# Altium PCB 网关.PcbDoc
Units mm, origin at the board's own origin, x right, y up, seen from the top; angles counter-clockwise.
Board outline 85.2 x 60.2 mm, 2 copper layers (Top Layer, Bottom Layer); 23 components, 24 nets, 150 pads, 101 vias.
Unrouted connection lines stored in the file: 2.
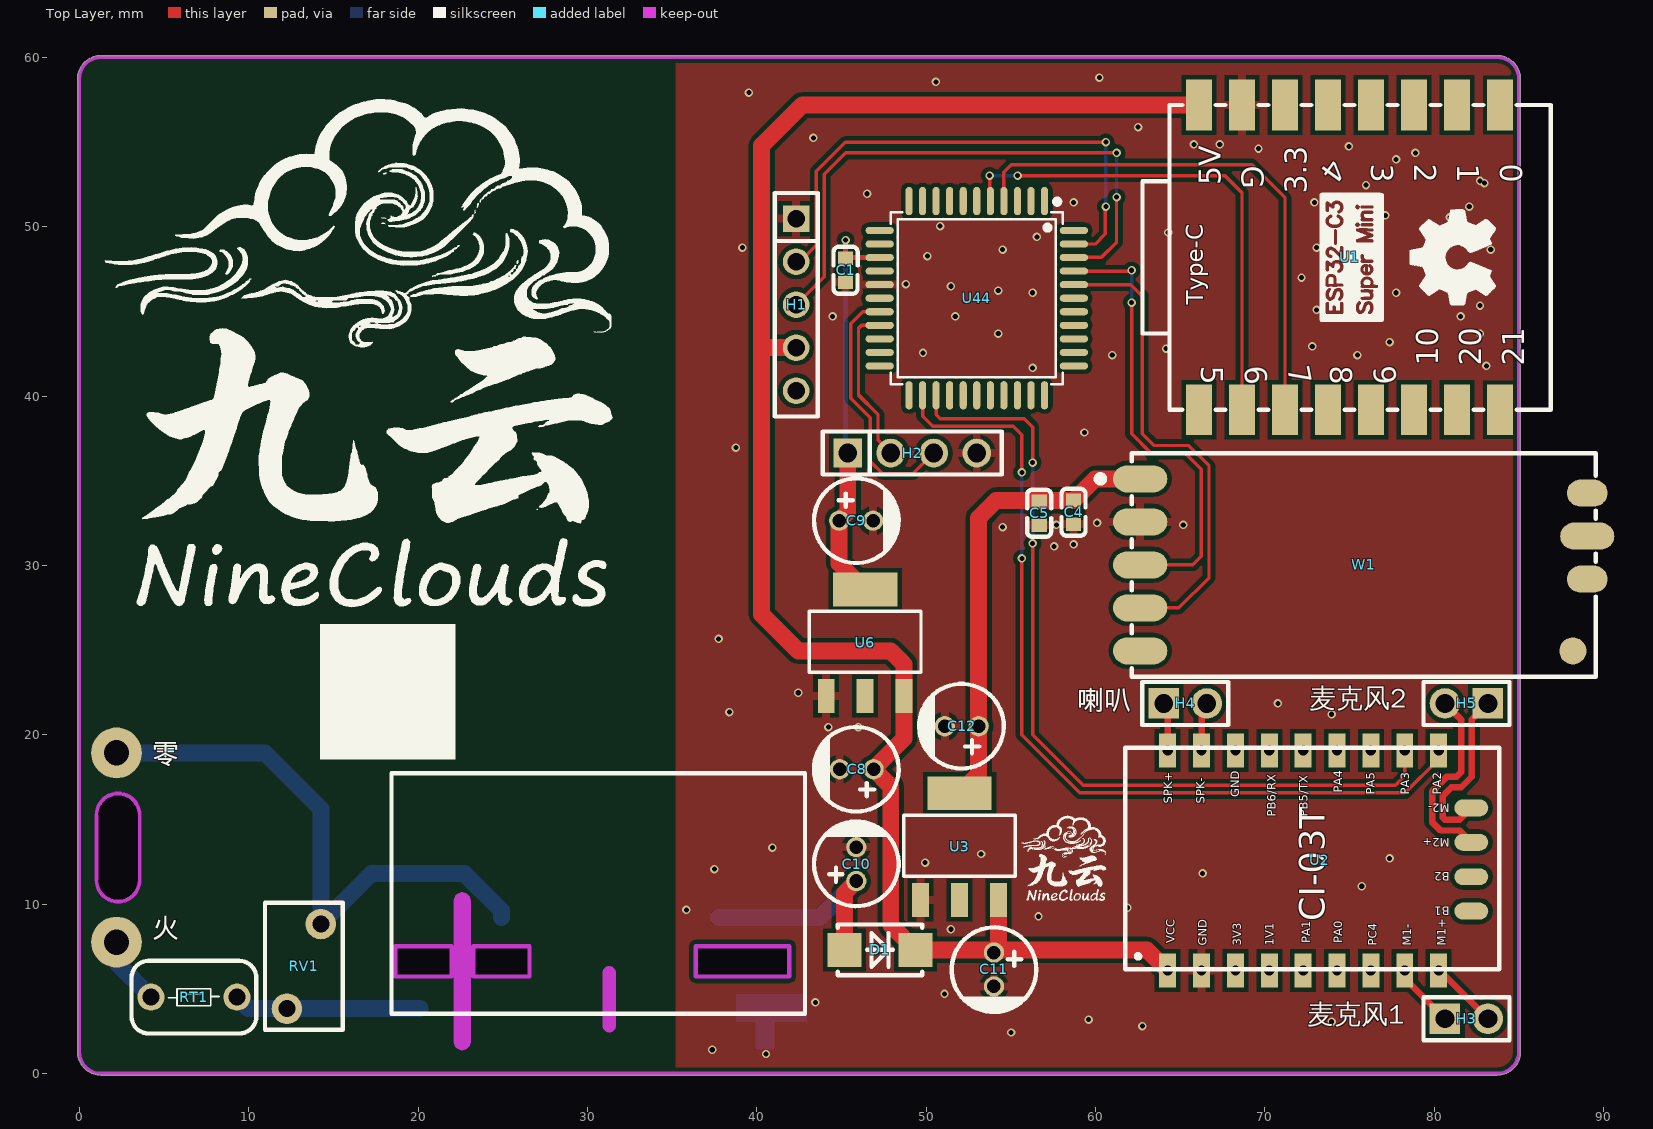
[diagram p0: Top Layer view]
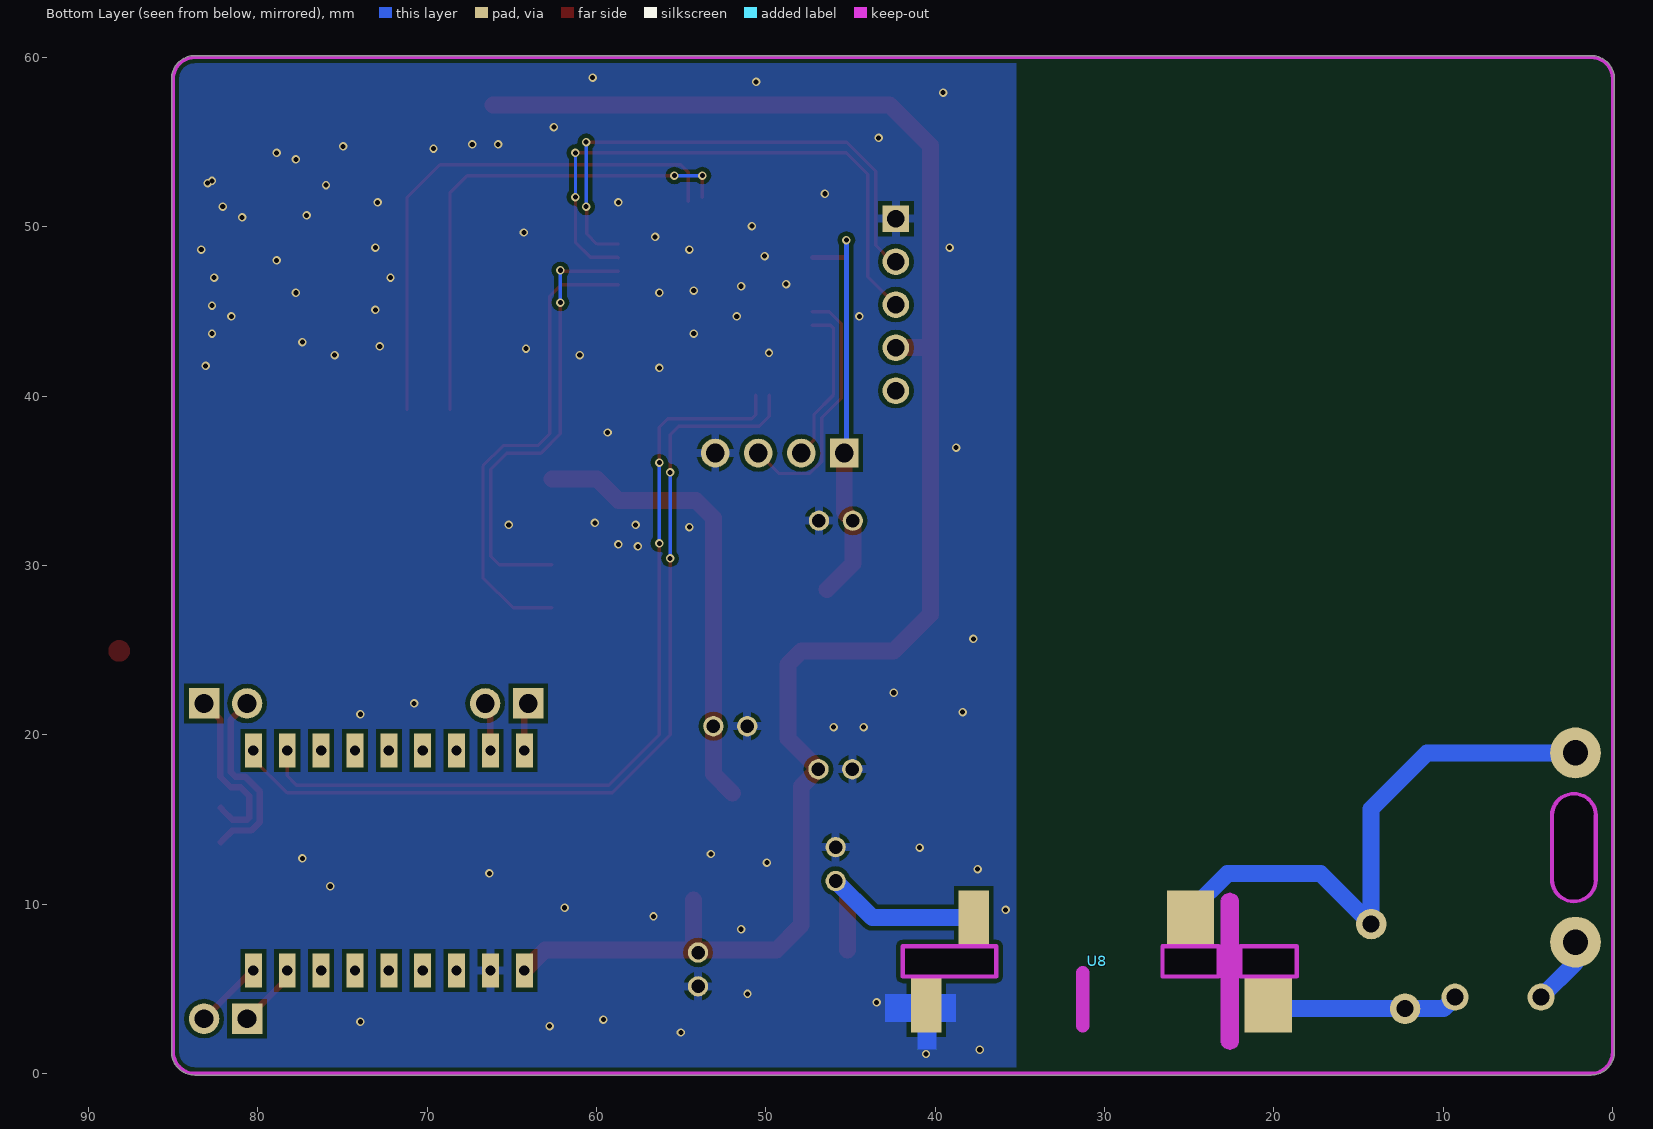
[diagram p1: Bottom Layer view, seen from below]

## Layer stack, top to bottom
Top Solder: solder mask 0.0102, Solder Resist, Dk 3.5
Top Layer: signal copper 0.0356
Dielectric 1: dielectric 0.32, FR-4, Dk 4.8
Bottom Layer: signal copper 0.0356
Bottom Solder: solder mask 0.0102, Solder Resist, Dk 3.5

## Board outline
-0.1,1.27 -0.1,58.73 cw(c1.27,58.73) 1.27,60.1 83.73,60.1 cw(c83.73,58.73) 85.1,58.73 85.1,1.27 cw(c83.73,1.27) 83.73,-0.1 1.27,-0.1 cw(c1.27,1.27)
cut-out: 0.916,11.43 ccw(c2.286,11.43) 2.286,10.06 ccw(c2.286,11.43) 3.645,11.258 ccw(c3.556,11.303) 3.656,11.303 3.656,15.24 ccw(c2.286,15.24) 2.286,16.61 ccw(c2.286,15.24) 0.916,15.24
cut-out: 22.106,1.905 ccw(c22.606,1.905) 23.106,1.905 23.106,10.16 ccw(c22.606,10.16) 22.106,10.16

## Design rules (kind name [scope] priority, off if disabled: settings)
Clearance [All] p1: gap=0.254
ComponentClearance [All] p1: gap=0 collisioncheckmode=3 verticalgap=0 showdistances=FALSE
DiffPairsRouting [All] p1: maxlimit=0.254 minlimit=0.254 mostfreqgap=0.254 toplayer_minwidth=0.381 toplayer_maxwidth=0.381 toplayer_prefwidth=0.381 bottomlayer_minwidth=0.381 bottomlayer_maxwidth=0.381 bottomlayer_prefwidth=0.381 maxuncoupledlength=12.7
PolygonConnect PolygonConnect_1 [All vs isvia] p1: connectstyle=Direct reliefconductorwidth=0.254 reliefentries=4 polygonreliefangle="90 Angle" airgapwidth=0.254
PolygonConnect [All] p2: connectstyle=Relief reliefconductorwidth=0.5 reliefentries=4 polygonreliefangle="90 Angle" airgapwidth=0.254
RoutingVias [All] p1: holewidth=0.711 width=1.27 viastyle="Through Hole" minholewidth=0.3 minwidth=0.5 maxholewidth=0.711 maxwidth=1.27
SolderMaskExpansion [All] p1: expansion=0.102
Width [All] p1: maxlimit=25.4 minlimit=0.2 preferedwidth=0.254 minimp=50.000000 maximp=50.000000 favimp=50.000000
28 further rules are at their usual default settings.

## Classes and differential pairs
differential pair NewDifferentialPair1: +NetH4_1 -NetH4_2
differential pair NewDifferentialPair2: +NetH5_1 -NetH5_2
differential pair NewDifferentialPair3: +NetH3_1 -NetH3_2

## Components (designator, comment, footprint, x,y, rotation, side; value= is the part's Value field where it differs from the comment)
C1 "100nF" C0603 45.249,47.427 r270 top
C4 "100nF" C0603 58.711,33.138 r90 top
C5 "1uF" C0603 56.679,33.076 r90 top
C8 "10uF" CAP-TH_BD5.0-P2.0-D0.8 45.9,17.963 r180 top
C9 "10uF" CAP-TH_BD5.0-P2.0-D0.8 45.87,32.639 r0 top
C10 "10uF" CAP-TH_BD5.0-P2.0-D0.8 45.884,12.359 r90 top
C11 "10uF" CAP-TH_BD5.0-P2.0-D0.8 54.012,6.136 r270 top
C12 "10uF" CAP-TH_BD5.0-P2.0-D0.8 52.107,20.503 r180 top
D1 "SS34" SMA(DO-214AC)_S2 47.281,7.295 r180 top
H1 "" HDR-TH_5P-P2.54-V-F 42.328,45.395 r270 top
H2 "" HDR-TH_4P-P2.54-V-F 49.186,36.632 r0 top
H3 "" HDR-TH_2P-P2.54-V-M-1 81.915,3.231 r0 top
H4 "" HDR-TH_2P-P2.54-V-M-1 65.315,21.844 r0 top
H5 "" HDR-TH_2P-P2.54-V-M-1 81.915,21.844 r180 top (schematic designator H3)
RT1 "05P/120Ω" RES-TH_L7.1-W4.1-P5.08-D0.50 6.768,4.501 r0 top
RV1 "07D621K" RES-TH_L7.5-W4.6-P5.00-D0.6-S2.00 13.261,6.319 r90 top
U1 "" ESP32-C3-SUPERMINI 74.84,48.189 r90 top
U2 "CI-03T 直插" "PCBComponent_1 - duplicate" 67.22,11.105 r90 top
U3 "LM1117S-3.3" SOT-223A 51.98,13.391 r0 top
U6 "LM1117S-3.3" SOT-223A 46.406,25.431 r0 top
U8 "RPD3W  5V700MA" RPD3W 30.429,6.6 r0 top
U44 "STC15W4K48S4-30I-LQFP44" LQFP-44_L10.0-W10.0-P0.80-LS12.0-BL 52.996,45.776 r180 top
W1 "HC-12_TH&SMD" COMM-SMD_HC-12 75.848,30.028 r0 top

## Footprints (in the part's own frame and the unit in brackets; to place one, negate y for a bottom-side part, rotate by r counter-clockwise, add the part's x,y. Pads: shape width x height; smd on the part's side, far side on the other; paste and mask are expansions set on the pad)
C0603 [mm]
  rect 0.8x0.9 smd: 1(-0.7,0) 2(0.7,0)
  silkscreen extent -1.39,-0.71 1.39,0.71
CAP-TH_BD5.0-P2.0-D0.8 [mm]
  round 1.2 hole 0.8: 1(-1,0) 2(1,0)
  silkscreen extent -2.48,-2.5 2.51,2.5
COMM-SMD_HC-12 [mm]
  oval 3.2x1.6 smd paste+0 mask+0.05: 1(-13.2,5.08) 2(-13.2,2.54) 3(-13.2,0) 4(-13.2,-2.54) 5(-13.2,-5.08) 6(13.2,1.7)
  oval 2.4x1.6 smd paste+0 mask+0.05: 7(13.2,4.24) 8(13.2,-0.84)
  round 1.6 smd paste+0 mask+0.05: 9(12.35,-5.08)
  Top Layer circle w0.64: c12.35,-5.08 r0.32
  silkscreen extent -15.75,-6.6 13.7,6.6
ESP32-C3-SUPERMINI [mm]
  rect 3x1.524 smd paste+0.102 mask+0.051: 0(9,-9.06) 1(9,-6.52) 2(9,-3.98) 3(9,-1.44) 4(9,1.1) 5(-9,8.72) 6(-9,6.18) 7(-9,3.64) 8(-9,1.1) 9(-9,-1.44) 10(-9,-3.98) 11(9,3.64) 12(9,6.18) 13(9,8.72) 20(-9,-6.52) 21(-9,-9.06)
  silkscreen extent -9,-12.06 9,12.06
HDR-TH_2P-P2.54-V-M-1 [mm]
  rect 1.8x1.8 hole 1.1: 1(-1.27,0)
  round 1.8 hole 1.1: 2(1.27,0)
  silkscreen extent -2.54,-1.27 2.54,1.27
HDR-TH_4P-P2.54-V-F [mm]
  rect 1.7x1.7 hole 1.1: 1(-3.81,0)
  round 1.7 hole 1.1: 2(-1.27,0) 3(1.27,0) 4(3.81,0)
  silkscreen extent -5.29,-1.27 5.29,1.27
HDR-TH_5P-P2.54-V-F [mil]
  rect 62x62 hole 40.16: 1(-200,0)
  round 62 hole 40.16: 2(-100,0) 3(0,0) 4(100,0) 5(200,0)
  silkscreen extent -260,-50 260,50
LQFP-44_L10.0-W10.0-P0.80-LS12.0-BL [mm]
  oval 0.42x1.67 smd: 1(-4,-5.735) 2(-3.2,-5.735) 3(-2.4,-5.735) 4(-1.6,-5.735) 5(-0.8,-5.735) 6(0,-5.735) 7(0.8,-5.735) 8(1.6,-5.735) 9(2.4,-5.735) 10(3.2,-5.735) 11(4,-5.735) 23(4,5.735) 24(3.2,5.735) 25(2.4,5.735) 26(1.6,5.735) 27(0.8,5.735) 28(0,5.735) 29(-0.8,5.735) 30(-1.6,5.735) 31(-2.4,5.735) 32(-3.2,5.735) 33(-4,5.735)
  oval 1.67x0.42 smd: 12(5.735,-4) 13(5.735,-3.2) 14(5.735,-2.4) 15(5.735,-1.6) 16(5.735,-0.8) 17(5.735,0) 18(5.735,0.8) 19(5.735,1.6) 20(5.735,2.4) 21(5.735,3.2) 22(5.735,4) 34(-5.735,4) 35(-5.735,3.2) 36(-5.735,2.4) 37(-5.735,1.6) 38(-5.735,0.8) 39(-5.735,0) 40(-5.735,-0.8) 41(-5.735,-1.6) 42(-5.735,-2.4) 43(-5.735,-3.2) 44(-5.735,-4)
  silkscreen extent -5.08,-5.85 5.08,5.08
"PCBComponent_1 - duplicate" [mm]
  rect 2x1 hole 0.61 paste+0 mask+0.102: 1(-5.033,2.949) 2(-5.033,0.949) 3(-5.033,-1.051) 4(-5.033,-3.051) 5(-5.033,-5.051) 6(-5.033,-7.051) 7(-5.033,-9.051) 8(-5.033,-11.051) 9(-5.033,-13.051) 14(7.967,-13.051) 15(7.967,-11.051) 16(7.967,-9.051) 17(7.967,-7.051) 18(7.967,-5.051) 19(7.967,-3.051) 20(7.967,-1.051) 21(7.967,0.949) 22(7.967,2.949)
  oval 1x2 smd paste+0 mask+0.102: 10(-1.524,-14.985) 11(0.508,-14.985) 12(2.54,-14.985) 13(4.572,-14.985)
  silkscreen extent -4.95,-16.64 8.13,5.46
RES-TH_L7.1-W4.1-P5.08-D0.50 [mm]
  round 1.6 hole 1: 1(-2.54,0) 2(2.54,0)
  silkscreen extent -3.68,-2.14 3.68,2.14
RES-TH_L7.5-W4.6-P5.00-D0.6-S2.00 [mm]
  round 1.8 hole 1: 1(-2.5,1) 2(2.5,-1)
  silkscreen extent -3.75,-2.3 3.75,2.3
RPD3W [mm]
  rect 2.8x3.2 on Bottom Overlay: 1(-10.1,2.6) 2(-5.5,-2.575)
  rect 2.8x3.2 smd far side: 1(-10.1,-2.575) 2(-5.5,2.6)
  rect 1.4x2.7 on Bottom Overlay: 3(2.2,-2.45) 4(-0.5,-2.45)
  rect 1.4x2.7 on Top Overlay: 3(2.2,-2.45) 4(-0.5,-2.45)
  rect 1.8x3.2 smd far side: 5(7.3,2.6) 6(10.1,-2.575)
  rect 1.8x3.2 on Bottom Overlay: 5(7.3,-2.575) 6(10.1,2.6)
  Keep-Out Layer board cut-out: -11.775,-0.875 -11.775,0.9 -8.45,0.9 -8.45,-0.875
  Keep-Out Layer board cut-out: -7.175,-0.875 -7.175,0.9 -3.85,0.9 -3.85,-0.875
  Keep-Out Layer board cut-out: 5.975,-0.875 5.975,0.9 11.5,0.9 11.5,-0.875
  Keep-Out Layer lines w0.254: -11.775,-0.875 -11.775,0.9 -8.45,0.9 -8.45,-0.875 -11.775,-0.875 ; -7.175,-0.875 -3.85,-0.875 -3.85,0.9 -7.175,0.9 -7.175,-0.875 ; 5.975,-0.875 5.975,0.9 11.5,0.9 11.5,-0.875 5.975,-0.875
  Keep-Out Layer lines w0.8: 0.875,-3.8 0.875,-0.65
  silkscreen extent -12,-3.08 12.43,11.12
SMA(DO-214AC)_S2 [mm]
  rect 2x2 smd: 1(2.1,0) 2(-2.1,0)
  silkscreen extent -2.5,-1.5 2.5,1.5
SOT-223A [mm]
  rect 1x2 smd: 1(-2.3,-3.15) 2(0,-3.15) 3(2.3,-3.15)
  rect 3.8x2 smd: 4(0,3.15)
  silkscreen extent -3.3,-1.75 3.3,1.85, body extent -3.25,-3.48 3.25,3.48, height 1.7

## Part data
C1: library part CAP_0603
C4: library part CGA4J2X8R1H104M125AA
C5: library part CL21B105KBFNNNE
C8 C9 C10 C11 C12: library part 10uF25V5x11KM
D1: library part SS34_C7420365, "二极管配置:独立式;正向压降(Vf):550mV@3A;直流反向耐压(Vr):40V;整流电流:3A;"
H1: library part HDR-F_2.54_1x5P
H2: library part HDR-F_2.54_1x4P
H3 H4 H5: library part HDR-M_2.54_1x2P
RT1: library part 3230P031M####2, "05P,120Ω"
RV1: library part 323107621K###0
U1: library part esp-32s
U8: library part RPD3W-BOT
U44: "CPU内核:51系列;应用领域:-;"

## Free pads (board coordinates)
  round 3 hole 1.5: 0(2.196,7.747) 1(2.196,18.923)

## Via types
v1: diameter 0.5, hole 0.3, Top Layer to Bottom Layer, tented both sides, 101 vias

## Nets (pads, with @x,y where several pads share a name; then routed paths per layer and width w, separated by ;. In a path a pad name is that pad's centre, name@x,y a point inside that pad or via, vN(x,y) a via of type N, cw(c..) or ccw(c..) an arc to the next point about the centre after c; other vN are vias at no path point)
+3.3V: C1.1 C9.1 H2.1 U6.2 U6.4 U44.14 | length 24.6
  Top Layer w0.3: v1(45.249,49.205) C1.1 45.298,48.176 U44.14
  Top Layer w1: H2.1 45.376,33.145 C9.1 44.87,30.117 U6.4
  Bottom Layer w0.3: v1(45.249,49.205) 45.249,36.759 H2.1
+3.3VB: C4.2 C5.2 C12.1 U3.2 U3.4 W1.1 | length 27.2
  Top Layer w1: U3.4 53.107,17.668 C12.1 53.107,32.806 54.139,33.838 C4.2 59.981,35.108 W1.1
+5V: C8.1 C11.1 D1.2 H1.4 U1.13 U2.1 U3.3 U6.3 | length 103
  Top Layer w1: 40.748,42.855 H1.4 ; C11.1 C11.1@54.171,7.295 ; U3.3 54.28,7.404 C11.1@54.171,7.295 ; U2.1 63.048,7.295 C11.1@54.171,7.295 ; U1.13 42.692,57.189 40.296,54.793 40.296,27.107 42.455,24.948 47.916,24.948 48.706,24.158 U6.3 48.706,19.769 C8.1 47.916,16.947 47.916,8.76 D1.2 C11.1@54.171,7.295
GND: C1.2 C4.1 C5.1 C8.2 C9.2 C10.2 C11.2 C12.2 H1.1 H2.4 U1.12 U2.2 U3.1 U6.1 U8.6@40.529,4.025 U44.16 W1.2
  other v1: 40.55,1.143 37.375,1.397 55.028,2.413 62.775,2.794 73.951,3.048 59.6,3.175 43.471,4.191 51.091,4.699 51.472,8.509 56.642,9.271 35.851,9.652 61.886,9.779 75.729,11.049 66.331,11.811 37.502,12.065 49.948,12.446 77.38,12.7 53.25,12.954 40.931,13.335 44.233,20.447 46.011,20.447 73.951,21.209 38.391,21.336 70.776,21.844 42.455,22.479 37.756,25.654 57.568,31.115 58.711,31.242 54.52,32.258 57.695,32.385 65.188,32.385 60.108,32.512 38.772,36.957 59.346,37.846 56.298,41.656 83.095,41.783 60.997,42.418 75.475,42.418 49.821,42.545 64.172,42.799 72.808,42.926 77.38,43.18 54.266,43.688 82.714,43.688 44.487,44.704 51.726,44.704 81.571,44.704 73.062,45.085 82.714,45.339 56.298,46.101 77.761,46.101 54.266,46.228 51.472,46.482 48.805,46.609 72.173,46.99 82.587,46.99 78.904,48.006 50.075,48.26 54.52,48.641 83.349,48.641 39.153,48.768 73.062,48.768 56.552,49.403 64.299,49.657 50.837,50.038 80.936,50.546 80.936,50.546 80.936,50.546 77.126,50.673 82.079,51.181 82.079,51.181 58.711,51.435 72.935,51.435 46.519,51.943 75.983,52.451 82.968,52.578 82.714,52.705 77.761,53.975 78.904,54.356 69.633,54.61 74.967,54.737 65.823,54.864 67.347,54.864 43.344,55.245 62.521,55.88 39.534,57.912 50.583,58.547 60.235,58.801
L: pad.0 RT1.1 | length 4.1
  Bottom Layer w1: pad.0 2.196,6.533 RT1.1
N: pad.1 RV1.2 U8.2@24.929,9.2 | length 33.5
  Bottom Layer w1: pad.1 10.959,18.923 14.261,15.621 RV1.2 17.253,11.811 22.733,11.811 24.929,9.615 U8.2@24.929,9.2
NetC10_1: C10.1 D1.1 U8.5@37.729,9.2 | length 13.4
  Top Layer w1: D1.1 45.181,10.656 C10.1
  Bottom Layer w1: U8.5@37.729,9.2 43.725,9.2 C10.1
NetH1_2: H1.2 U44.43 | length 31.3
  Top Layer w0.2: H1.2 42.565,47.935 43.525,48.895 43.525,53.274 45.242,54.991 v1(60.616,54.991) ; U44.43 59.981,48.976 60.591,49.586 60.591,51.181 v1(60.616,51.181)
  Bottom Layer w0.2: v1(60.616,51.181) v1(60.616,54.991)
NetH1_3: H1.3 U44.42 | length 34.3
  Top Layer w0.2: H1.3 43.979,47.046 43.979,53.086 45.249,54.356 v1(61.251,54.356) ; U44.42 58.744,48.189 60.362,48.189 61.251,49.078 v1(61.251,51.745)
  Bottom Layer w0.2: v1(61.251,51.745) v1(61.251,54.356)
NetH2_2: H2.2 U44.19 | length 9.5
  Top Layer w0.2: U44.19 46.189,44.176 46.011,43.998 46.011,40.061 47.166,38.906 47.166,37.382 H2.2
NetH2_3: H2.3 U44.18 | length 15.1
  Top Layer w0.2: U44.18 46.265,44.976 45.557,44.268 45.557,39.873 46.712,38.718 46.712,36.133 47.417,35.428 49.252,35.428 H2.3
NetH3_1: H3.1 U2.8 | length 3.8
  Top Layer w0.381: U2.8 78.271,5.605 H3.1
NetH3_2: H3.2 U2.9 | length 4.1
  Top Layer w0.381: U2.9 80.344,6.072 H3.2
NetH4_1: H4.1 U2.22 | length 2.9
  Top Layer w0.381: H4.1 64.271,21.618 U2.22
NetH4_2: H4.2 U2.21 | length 2.9
  Top Layer w0.381: U2.21 66.271,21.53 H4.2
NetH5_1: H5.1 U2.13 | length 10.2
  Top Layer w0.381: U2.13 82.016,15.486 81.508,14.978 80.645,14.978 80.518,15.105 80.518,16.383 81.026,16.891 81.602,16.891 82.233,17.521 82.233,20.892 H5.1
NetH5_2: H5.2 U2.12 | length 11.3
  Top Layer w0.381: H5.2 81.598,20.892 81.598,17.785 81.339,17.526 80.763,17.526 79.883,16.646 79.883,14.842 80.382,14.343 81.508,14.343 82.016,13.835 U2.12
NetRT1_2: RT1.2 RV1.1 U8.1@20.329,4.025 | length 11.1
  Bottom Layer w1: RT1.2 9.99,3.819 RV1.1 U8.1@20.123,3.819
NetU2_14: U2.14 U44.24 | length 52.6
  Top Layer w0.2: U44.24 49.796,38.816 50.402,38.21 55.155,38.21 55.663,37.702 v1(55.663,35.489) ; v1(55.663,30.409) 55.663,19.988 59.087,16.564 78.286,16.564 80.271,18.549 U2.14
  Bottom Layer w0.2: v1(55.663,30.409) v1(55.663,35.489)
NetU2_15: U2.15 U44.25 | length 50.2
  Top Layer w0.2: U44.25 50.596,38.905 50.837,38.664 55.79,38.664 56.298,38.156 v1(56.298,36.068) ; v1(56.298,31.298) 56.298,19.995 59.275,17.018 77.724,17.018 78.271,17.565 U2.15
  Bottom Layer w0.2: v1(56.298,31.298) v1(56.298,36.068)
NetU44_40: U44.40 W1.4 | length 28.6
  Top Layer w0.2: U44.40 62.102,46.576 62.775,45.903 62.775,37.775 63.474,37.076 65.506,37.076 66.712,35.87 66.712,29.266 64.934,27.488 W1.4
NetU44_41: U44.41 W1.3 | length 27
  Top Layer w0.2: U44.41 62.089,47.376 v1(62.14,47.427) ; v1(62.14,45.522) 62.14,37.768 63.285,36.622 65.317,36.622 66.258,35.682 66.258,30.536 65.75,30.028 W1.3
  Bottom Layer w0.2: v1(62.14,45.522) v1(62.14,47.427)
RX: U1.6 U44.5 | length 29.4
  Top Layer w0.2: U44.5@53.758,51.745 v1(53.758,53.015) ; v1(55.409,53.015) 67.655,53.015 68.66,52.01 U1.6
  Bottom Layer w0.2: v1(53.758,53.015) v1(55.409,53.015)
TX: U1.7 U44.4 | length 31.8
  Top Layer w0.2: U44.4 54.596,53.218 55.028,53.65 69.252,53.65 71.2,51.702 U1.7
pads on no net: H1.5 U1.0 U1.1 U1.2 U1.3 U1.4 U1.5 U1.8 U1.9 U1.10 U1.11 U1.20 U1.21 U2.3 U2.4 U2.5 U2.6 U2.7 U2.10 U2.11 U2.16 U2.17 U2.18 U2.19 U2.20 U8.1@20.329,9.2 U8.2@24.929,4.025 U8.3 U8.4 U8.5@37.729,4.025 U8.6@40.529,9.2 U44.1 U44.2 U44.3 U44.6 U44.7 U44.8 U44.9 U44.10 U44.11 U44.12 U44.13 U44.15 U44.17 U44.20 U44.21 U44.22 U44.23 U44.26 U44.27 U44.28 U44.29 U44.30 U44.31 U44.32 U44.33 U44.34 U44.35 U44.36 U44.37 U44.38 U44.39 U44.44 W1.5 W1.6 W1.7 W1.8 W1.9

## Polygon pours and split planes (outlines as drawn)
GND on Top Layer "Top Layer-No Net" (solid, remove dead copper, pour order 4): 0,0 0,60 85,60 85,0
GND on Bottom Layer "Top Layer-No Net1" (solid, remove dead copper, pour order 6): 0,0 0,60 85,60 85,0

## Keep-outs
Keep-Out Layer:
  lines w0.2: 0,1.397 0,58.73 ; 0,3.175 0,1.27 ccw(c1.27,1.27) 1.27,0 7.149,0 ; 0,51.943 0,58.73 ; 1.397,0 83.222,0 ; 3.556,11.303 3.556,15.24 ccw(c2.286,15.24) 2.286,16.51 ccw(c2.286,15.24) 1.016,15.24 1.016,11.43 ccw(c2.286,11.43) 2.286,10.16 ccw(c2.286,11.43) 3.556,11.43 ; 82.587,60 83.73,60 ; 82.841,0 83.73,0 ccw(c83.73,1.27) 85,1.27 85,2.286 ; 85,1.778 85,58.73 ; 85,56.261 85,58.73 ; 0,58.73 cw(c1.27,58.73) 1.27,60 83.73,60 ; 83.73,60 cw(c83.73,58.73) 85,58.73
  lines w1: 22.606,1.905 22.606,10.16

## Other copper
Top Layer:
  pour cut-out: 35.216,59.995 0.012,59.995 0.012,0 35.216,0
Bottom Layer:
  rectangle net GND: 38.772,3.048 42.963,4.699
  rectangle net GND: 39.915,1.397 41.058,4.699
  pour cut-out: 35.216,59.995 0.012,59.995 0.012,0 35.216,0

## Silkscreen, mask and mechanical layers (free items; w line width, h text height)
Top Overlay:
  drawing of 67 lines, arcs and shapes, not listed
  text "麦克风2" at 72.644,21.209 h2
  text "喇叭" at 58.928,21.082 h2
  text "零" at 4.318,17.907 h2
  text "火" at 4.318,7.62 h2
  text "麦克风1" at 72.517,2.54 h2

## Text inside footprints (layer, text, board x,y; h text height)
U1: Top Overlay "Type-C" at 66.366,45.395 h1 r90; Top Overlay "0" at 83.898,53.726 h1.3 r270; Top Overlay "1" at 81.358,53.726 h1.3 r270; Top Overlay "2" at 78.818,53.726 h1.3 r270; Top Overlay "3" at 76.278,53.726 h1.3 r270; Top Overlay "4" at 73.862,54.108 h1.3 r234; Top Overlay "G" at 68.658,53.599 h1.3 r270; Top Overlay "3.3" at 72.498,51.948 h1.3 r90; Top Overlay "5V" at 67.418,52.456 h1.3 r90; Top Overlay "21" at 85.325,41.788 h1.3 r90; Top Overlay "20" at 82.785,41.788 h1.3 r90; Top Overlay "10" at 80.245,41.788 h1.3 r90; Top Overlay "9" at 76.407,41.731 h1.3 r275; Top Overlay "8" at 73.865,41.788 h1.3 r270; Top Overlay "7" at 71.337,41.664 h1.3 r281; Top Overlay "6" at 68.787,41.731 h1.3 r275; Top Overlay "5" at 66.245,41.788 h1.3 r270
U2: Top Overlay "CI-03T" at 73.542,8.993 h1.5 r90; Top Overlay "GND" at 68.49,16.312 h0.5 r90; Top Overlay "PB6/RX" at 70.649,15.169 h0.5 r90; Top Overlay "PB5/TX" at 72.554,15.169 h0.5 r90; Top Overlay "PA2" at 80.428,16.439 h0.5 r90; Top Overlay "PA3" at 78.523,16.439 h0.5 r90; Top Overlay "PA4" at 74.586,16.566 h0.5 r90; Top Overlay "PA5" at 76.491,16.439 h0.5 r90; Top Overlay "SPK+" at 64.553,15.931 h0.5 r90; Top Overlay "SPK-" at 66.458,15.931 h0.5 r90; Top Overlay "M2-" at 80.936,15.931 h0.5 r180; Top Overlay "M2+" at 80.936,13.899 h0.5 r180; Top Overlay "B1" at 80.936,9.835 h0.5 r180; Top Overlay "B2" at 80.936,11.867 h0.5 r180; Top Overlay "M1+" at 80.682,7.549 h0.5 r90; Top Overlay "M1-" at 78.65,7.549 h0.5 r90; Top Overlay "PC4" at 76.618,7.549 h0.5 r90; Top Overlay "PA0" at 74.586,7.676 h0.5 r90; Top Overlay "PA1" at 72.681,7.676 h0.5 r90; Top Overlay "1V1" at 70.522,7.549 h0.5 r90; Top Overlay "3V3" at 68.617,7.549 h0.5 r90; Top Overlay "GND" at 66.585,7.549 h0.5 r90; Top Overlay "VCC" at 64.68,7.676 h0.5 r90